# EAGLE board pressure_foot (EAGLE 6.2)

Size 19.05 x 19.05 mm. Coordinates in mm from the lower left corner, seen from the top.
Outline: circle at 9.53,9.53 radius 9.53
Copper layers (1*16): Top 0.035mm / dielectric 1.5mm / Bottom 0.035mm
Design rules: minimum track width 7mil, minimum drill 15mil, track to track 7mil, track to pad 7mil, pad to pad 7mil, via to via 7mil, smd to smd 7mil, copper to edge 16mil, drill to drill 8mil, minimum pad ring 10mil, minimum via ring 8mil, stop-mask expansion 4mil, vias tented up to drill 0mil, thermal gap 10mil
Holes 4.76 mm at 9.53,9.53

## Footprints (pad centres in the part's own frame; a part is rotated, then mirrored left to right if it is on the bottom)
C0603 = smd 1.1 x 1: 1 -0.85,0; 2 0.85,0
R0603 = smd 1 x 1.1: 1 -0.85,0; 2 0.85,0
LGA8 = smd 1.2 x 0.5: 1 -1.2,1.875; 2 -1.2,0.625; 3 -1.2,-0.625; 4 -1.2,-1.875; 5 1.2,-1.875; 6 1.2,-0.625; 7 1.2,0.625; 8 1.2,1.875
QFN20 = smd 2.4 x 2.4: 0 0,0 | smd 0.65 x 0.3: 1 -1.9,1; 2 -1.9,0.5; 3 -1.9,0; 4 -1.9,-0.5; 5 -1.9,-1; 11 1.9,-1; 12 1.9,-0.5; 13 1.9,0; 14 1.9,0.5; 15 1.9,1 | smd 0.3 x 0.65: 6 -1,-1.9; 7 -0.5,-1.9; 8 0,-1.9; 9 0.5,-1.9; 10 1,-1.9; 16 1,1.9; 17 0.5,1.9; 18 0,1.9; 19 -0.5,1.9; 20 -1,1.9

## Placement (x,y rotation side)
C1  1uF  [C0603]  6.11,3.82 30 top
C2  1uF  [C0603]  6.46,15.19 270 top
C3  1uF  [C0603]  16.05,9.74 150 top
R1  68  [R0603]  1.82,9.48 60 bottom
R2  68  [R0603]  3.32,11.21 60 bottom
R3  4.7k  [R0603]  9.54,2.33 270 top
R4  4.7k  [R0603]  12.23,3.03 270 top
R5  4.7k  [R0603]  15.23,12.73 0 top
R6  4.7k  [R0603]  14.44,15.04 0 top
R7  4.7k  [R0603]  1.53,10.44 90 top
R8  4.7k  [R0603]  3.63,11.44 90 top
U1  MPL115A  [LGA8]  4.03,6.19 120 top
U2  MPL115A  [LGA8]  9.59,15.82 0 top
U3  MPL115A  [LGA8]  14.8,6.08 240 top
U$1  ATTINY1634QFN20  [QFN20]  4.28,6.12 330 bottom

## Library data of the parts
C1-C3 R1-R8 = rcl
U1-U3 = SparkFun-Sensors
U$1 = attiny1634

## Nets
GND: C1.2 C2.2 C3.2 U1.3 U2.3 U3.3 U$1.0 U$1.8
N$1: R8.1 U1.8 U$1.7
N$2: R1.2
N$3: R2.1 U$1.18
N$4: R1.1 U$1.17
N$5: R2.2
N$6: C1.1 U1.2
N$7: C3.1 U3.2
N$8: R6.1 U2.8 U$1.5
N$9: R5.1 U2.7 U$1.4
N$10: U1.4 U2.4 U3.4 U$1.15
N$11: C2.1 U2.2
N$12: R7.1 U1.7 U$1.6
N$13: R4.1 U3.8 U$1.3
N$14: R3.1 U3.7 U$1.2
N$15: U$1.14
N$16: U$1.12
VCC: R3.2 R4.2 R5.2 R6.2 R7.2 R8.2 U1.1 U1.5 U2.1 U2.5 U3.1 U3.5 U$1.9

## Tracks (layer width: path | path; a pad name or v marks a point on that pad's centre or on a via)
GND  (7 unrouted)
N$1  (2 unrouted)
N$3  (1 unrouted)
N$4  (1 unrouted)
N$6  (1 unrouted)
N$7  (1 unrouted)
N$8  (2 unrouted)
N$9  (2 unrouted)
N$10  (3 unrouted)
N$11  (1 unrouted)
N$12  (2 unrouted)
N$13  (2 unrouted)
N$14  (2 unrouted)
VCC  (12 unrouted)

## Text on the board
tPlace: jjp@pobox.com | (c) 2014 | v1